# EAGLE board Daughter Card Schematic (EAGLE 6.5.1)
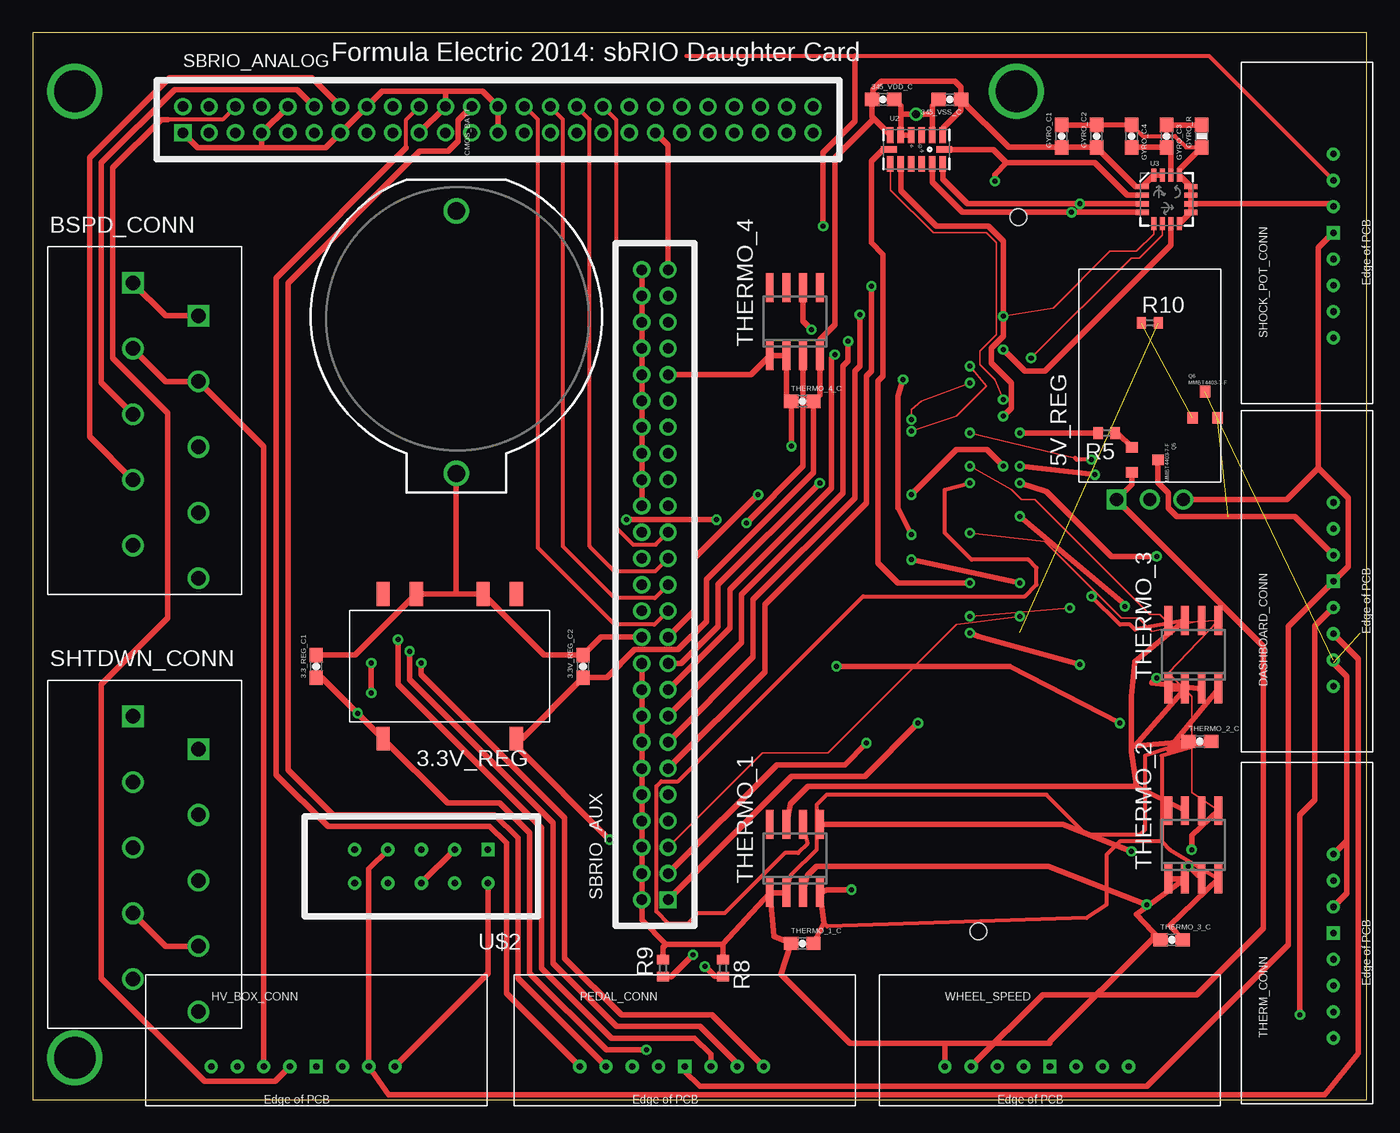
[diagram p0: board, top side]
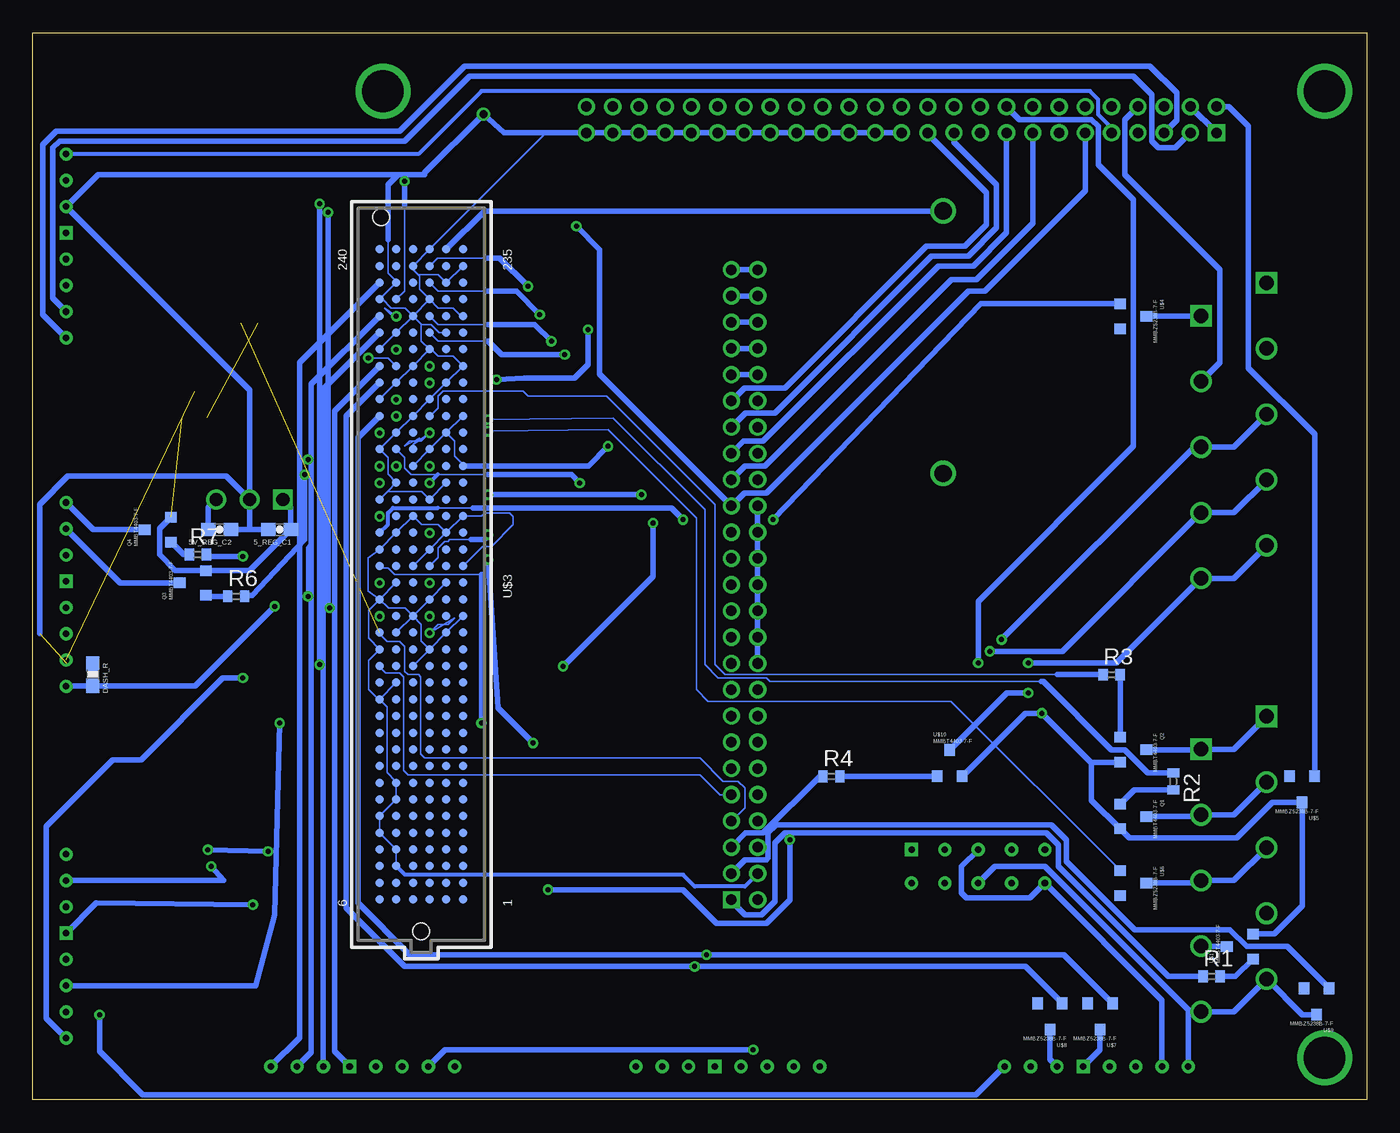
[diagram p1: board, bottom side, seen from below]

Size 101.6 x 81.28 mm. Coordinates in mm from the lower left corner, seen from the top.
Outline: 0,0 101.6,0 101.6,81.28 0,81.28 0,0
Copper layers (1*16): Top 0.035mm / dielectric 1.5mm / Bottom 0.035mm
Design rules "PCBFabExpress DRC *": minimum track width 5mil, minimum drill 15mil, track to track 5mil, track to pad 8mil, pad to pad 8mil, via to via 8mil, smd to smd 8mil, copper to edge 40mil, drill to drill 8mil, minimum pad ring 10mil, minimum via ring 8mil, stop-mask expansion 4mil, vias tented up to drill 15mil, thermal gap 10mil
Net classes: 0 default: clearance 0.205 mm

## Footprints (pad centres in the part's own frame; a part is rotated, then mirrored left to right if it is on the bottom)
0603-CAP = smd 1.1 x 1: 1 -0.85,0; 2 0.85,0
V78XX-1000 = smd 1 x 1.8: 1 -5.08,-5.51; 5 5.08,-5.51; 6 5.08,5.51; 7 2.54,5.51; 9 -2.54,5.51; 10 -5.08,5.51
V78XX-1500R = drill 1 square: P$1 0,2.54 | drill 1: P$2 0,0; P$3 0,-2.54
CONNECTOR_5 = drill 1.1 square: 1 0,0; 2 2.5,5 | drill 1.1: 3 5,0; 4 7.5,5; 5 10,0; 6 12.5,5; 7 15,0; 8 17.5,5; 9 20,0; 10 22.5,5
BATTCOM_20MM_PTH = drill 1.3: 1 11.85,0; 2 -8.15,0
0603-RES = smd 1.1 x 1: 1 -0.85,0; 2 0.85,0
EN3_PCB_8 = drill 0.5 square: P$1 0,0 | drill 0.5: P$2 2,0; P$3 4,0; P$4 6,0; P$5 -8,0; P$6 -6,0; P$7 -4,0; P$8 -2,0
SOT-23-3 = smd 0.8 x 0.9: P$1 0,1; P$2 -0.95,-1; P$3 0.95,-1
R0402 = smd 0.7 x 0.9: 1 -0.65,0; 2 0.65,0
SBRIO_J502_J503 = drill 0.8 square: P$1 0,0 | drill 0.8: P$2 0,2; P$3 2,0; P$4 2,2; P$5 4,0; P$6 4,2; P$7 6,0; P$8 6,2; P$9 8,0; P$10 8,2; P$11 10,0; P$12 10,2; P$13 12,0; P$14 12,2; P$15 14,0; P$16 14,2; P$17 16,0; P$18 16,2; P$19 18,0; P$20 18,2; P$21 20,0; P$22 20,2; P$23 22,0; P$24 22,2; P$25 24,0; P$26 24,2; P$27 26,0; P$28 26,2; P$29 28,0; P$30 28,2; P$31 30,0; P$32 30,2; P$33 32,0; P$34 32,2; P$35 34,0; P$36 34,2; P$37 36,0; P$38 36,2; P$39 38,0; P$40 38,2; P$41 40,0; P$42 40,2; P$43 42,0; P$44 42,2; P$45 44,0; P$46 44,2; P$47 46,0; P$48 46,2; P$49 48,0; P$50 48,2
SO08 = smd 0.6 x 2.2: 1 -1.905,-2.6; 2 -0.635,-2.6; 3 0.635,-2.6; 4 1.905,-2.6; 5 1.905,2.6; 6 0.635,2.6; 7 -0.635,2.6; 8 -1.905,2.6
LGA14 = smd 0.5 x 1.2: 1 2,1.1; 2 1.2,1.1; 3 0.4,1.1; 4 -0.4,1.1; 5 -1.2,1.1; 6 -2,1.1; 8 -2,-1.1; 9 -1.2,-1.1; 10 -0.4,-1.1; 11 0.4,-1.1; 12 1.2,-1.1; 13 2,-1.1 | smd 1.2 x 0.5: 7 -2.1,0; 14 2.1,0
LGA16-4X4 = smd 1 x 0.4: 1 -1.85,0.975; 2 -1.85,0.325; 3 -1.85,-0.325; 4 -1.85,-0.975; 9 1.85,-0.975; 10 1.85,-0.325; 11 1.85,0.325; 12 1.85,0.975 | smd 0.4 x 1: 5 -0.975,-1.85; 6 -0.325,-1.85; 7 0.325,-1.85; 8 0.975,-1.85; 13 0.975,1.85; 14 0.325,1.85; 15 -0.325,1.85; 16 -0.975,1.85
SBRIO_W = drill 0.5 square: P$1 -5.08,-1.27 | drill 0.5: P$2 -5.08,1.27; P$3 -2.54,-1.27; P$4 -2.54,1.27; P$5 0,-1.27; P$6 0,1.27; P$7 2.54,-1.27; P$8 2.54,1.27; P$9 5.08,-1.27; P$10 5.08,1.27
SEAM-40-XX.X-XX-06-X-A = smd 0.635 x 0.635: 1 24.765,3.175; 2 24.765,1.905; 3 24.765,0.635; 4 24.765,-0.635; 5 24.765,-1.905; 6 24.765,-3.175; 7 23.495,3.175; 8 23.495,1.905; 9 23.495,0.635; 10 23.495,-0.635; 11 23.495,-1.905; 12 23.495,-3.175; 13 22.225,3.175; 14 22.225,1.905; 15 22.225,0.635; 16 22.225,-0.635; 17 22.225,-1.905; 18 22.225,-3.175; 19 20.955,3.175; 20 20.955,1.905; 21 20.955,0.635; 22 20.955,-0.635; 23 20.955,-1.905; 24 20.955,-3.175; 25 19.685,3.175; 26 19.685,1.905; 27 19.685,0.635; 28 19.685,-0.635; 29 19.685,-1.905; 30 19.685,-3.175; 31 18.415,3.175; 32 18.415,1.905; 33 18.415,0.635; 34 18.415,-0.635; 35 18.415,-1.905; 36 18.415,-3.175; 37 17.145,3.175; 38 17.145,1.905; 39 17.145,0.635; 40 17.145,-0.635; 41 17.145,-1.905; 42 17.145,-3.175; 43 15.875,3.175; 44 15.875,1.905; 45 15.875,0.635; 46 15.875,-0.635; 47 15.875,-1.905; 48 15.875,-3.175; 49 14.605,3.175; 50 14.605,1.905; 51 14.605,0.635; 52 14.605,-0.635; 53 14.605,-1.905; 54 14.605,-3.175; 55 13.335,3.175; 56 13.335,1.905; 57 13.335,0.635; 58 13.335,-0.635; 59 13.335,-1.905; 60 13.335,-3.175; 61 12.065,3.175; 62 12.065,1.905; 63 12.065,0.635; 64 12.065,-0.635; 65 12.065,-1.905; 66 12.065,-3.175; 67 10.795,3.175; 68 10.795,1.905; 69 10.795,0.635; 70 10.795,-0.635; 71 10.795,-1.905; 72 10.795,-3.175; 73 9.525,3.175; 74 9.525,1.905; 75 9.525,0.635; 76 9.525,-0.635; 77 9.525,-1.905; 78 9.525,-3.175; 79 8.255,3.175; 80 8.255,1.905; 81 8.255,0.635; 82 8.255,-0.635; 83 8.255,-1.905; 84 8.255,-3.175; 85 6.985,3.175; 86 6.985,1.905; 87 6.985,0.635; 88 6.985,-0.635; 89 6.985,-1.905; 90 6.985,-3.175; 91 5.715,3.175; 92 5.715,1.905; 93 5.715,0.635; 94 5.715,-0.635; 95 5.715,-1.905; 96 5.715,-3.175; 97 4.445,3.175; 98 4.445,1.905; 99 4.445,0.635; 100 4.445,-0.635; 101 4.445,-1.905; 102 4.445,-3.175; 103 3.175,3.175; 104 3.175,1.905; 105 3.175,0.635; 106 3.175,-0.635; 107 3.175,-1.905; 108 3.175,-3.175; 109 1.905,3.175; 110 1.905,1.905; 111 1.905,0.635; 112 1.905,-0.635; 113 1.905,-1.905; 114 1.905,-3.175; 115 0.635,3.175; 116 0.635,1.905; 117 0.635,0.635; 118 0.635,-0.635; 119 0.635,-1.905; 120 0.635,-3.175; 121 -0.635,3.175; 122 -0.635,1.905; 123 -0.635,0.635; 124 -0.635,-0.635; 125 -0.635,-1.905; 126 -0.635,-3.175; 127 -1.905,3.175; 128 -1.905,1.905; 129 -1.905,0.635; 130 -1.905,-0.635; 131 -1.905,-1.905; 132 -1.905,-3.175; 133 -3.175,3.175; 134 -3.175,1.905; 135 -3.175,0.635; 136 -3.175,-0.635; 137 -3.175,-1.905; 138 -3.175,-3.175; 139 -4.445,3.175; 140 -4.445,1.905; 141 -4.445,0.635; 142 -4.445,-0.635; 143 -4.445,-1.905; 144 -4.445,-3.175; 145 -5.715,3.175; 146 -5.715,1.905; 147 -5.715,0.635; 148 -5.715,-0.635; 149 -5.715,-1.905; 150 -5.715,-3.175; 151 -6.985,3.175; 152 -6.985,1.905; 153 -6.985,0.635; 154 -6.985,-0.635; 155 -6.985,-1.905; 156 -6.985,-3.175; 157 -8.255,3.175; 158 -8.255,1.905; 159 -8.255,0.635; 160 -8.255,-0.635; 161 -8.255,-1.905; 162 -8.255,-3.175; 163 -9.525,3.175; 164 -9.525,1.905; 165 -9.525,0.635; 166 -9.525,-0.635; 167 -9.525,-1.905; 168 -9.525,-3.175; 169 -10.795,3.175; 170 -10.795,1.905; 171 -10.795,0.635; 172 -10.795,-0.635; 173 -10.795,-1.905; 174 -10.795,-3.175; 175 -12.065,3.175; 176 -12.065,1.905; 177 -12.065,0.635; 178 -12.065,-0.635; 179 -12.065,-1.905; 180 -12.065,-3.175; 181 -13.335,3.175; 182 -13.335,1.905; 183 -13.335,0.635; 184 -13.335,-0.635; 185 -13.335,-1.905; 186 -13.335,-3.175; 187 -14.605,3.175; 188 -14.605,1.905; 189 -14.605,0.635; 190 -14.605,-0.635; 191 -14.605,-1.905; 192 -14.605,-3.175; 193 -15.875,3.175; 194 -15.875,1.905; 195 -15.875,0.635; 196 -15.875,-0.635; 197 -15.875,-1.905; 198 -15.875,-3.175; 199 -17.145,3.175; 200 -17.145,1.905; 201 -17.145,0.635; 202 -17.145,-0.635; 203 -17.145,-1.905; 204 -17.145,-3.175; 205 -18.415,3.175; 206 -18.415,1.905; 207 -18.415,0.635; 208 -18.415,-0.635; 209 -18.415,-1.905; 210 -18.415,-3.175; 211 -19.685,3.175; 212 -19.685,1.905; 213 -19.685,0.635; 214 -19.685,-0.635; 215 -19.685,-1.905; 216 -19.685,-3.175; 217 -20.955,3.175; 218 -20.955,1.905; 219 -20.955,0.635; 220 -20.955,-0.635; 221 -20.955,-1.905; 222 -20.955,-3.175; 223 -22.225,3.175; 224 -22.225,1.905; 225 -22.225,0.635; 226 -22.225,-0.635; 227 -22.225,-1.905; 228 -22.225,-3.175; 229 -23.495,3.175; 230 -23.495,1.905; 231 -23.495,0.635; 232 -23.495,-0.635; 233 -23.495,-1.905; 234 -23.495,-3.175; 235 -24.765,3.175; 236 -24.765,1.905; 237 -24.765,0.635; 238 -24.765,-0.635; 239 -24.765,-1.905; 240 -24.765,-3.175 | hole 1.27: 27.191,0; -27.191,-3.048

## Placement (x,y rotation side)
3.3_REG_C1  10uF  [0603-CAP]  21.59,33.02 90 top
3.3V_REG  V7803-1000  [V78XX-1000]  31.75,33.02 0 top
3.3V_REG_C2  22uF  [0603-CAP]  41.91,33.02 90 top
5_REG_C1  10uF  [0603-CAP]  82.8,43.43 180 bottom
5V_REG  V78XX-1500  [V78XX-1500R]  85.09,45.72 90 top
5V_REG_C2  22uF  [0603-CAP]  87.38,43.43 180 bottom
345_VDD_C  .1uF  [0603-CAP]  64.77,76.2 0 top
345_VSS_C  1uF  [0603-CAP]  69.85,76.2 180 top
BSPD_CONN  CONN_5  [CONNECTOR_5]  7.62,62.23 270 top
CMOS_BATT  [BATTCOM_20MM_PTH]  32.26,59.56 270 top
DASH_R  10k  [0603-RES]  97.03,32.38 270 bottom
DASHBOARD_CONN  EN3_PCB_8  [EN3_PCB_8]  99.06,39.5 90 top
GYRO_C1  .1uF  [0603-CAP]  78.36,73.41 90 top
GYRO_C2  10uF  [0603-CAP]  81.03,73.41 90 top
GYRO_C3  470nF  [0603-CAP]  86.36,73.41 270 top
GYRO_C4  10nF  [0603-CAP]  83.69,73.41 270 top
GYRO_R  10K  [0603-RES]  89.03,73.41 90 top
HV_BOX_CONN  EN3_PCB_8  [EN3_PCB_8]  21.59,2.54 0 top
PEDAL_CONN  EN3_PCB_8  [EN3_PCB_8]  49.66,2.54 0 top
Q1  MMBT4403-7-F  [SOT-23-3]  17.78,21.59 270 bottom
Q2  MMBT4403-7-F  [SOT-23-3]  17.78,26.67 270 bottom
Q3  MMBT4403-7-F  [SOT-23-3]  89.41,39.37 90 bottom
Q4  MMBT4403-7-F  [SOT-23-3]  92.08,43.43 90 bottom
Q5  MMBT4403-7-F  [SOT-23-3]  84.71,48.77 270 top
Q6  MMBT4403-7-F  [SOT-23-3]  89.28,52.96 0 top
R1  1.3K  [R0402]  11.81,9.4 0 bottom
R2  1.3K  [R0402]  14.73,24.26 270 bottom
R3  1.3K  [R0402]  19.43,32.38 0 bottom
R4  1.3K  [R0402]  40.77,24.64 0 bottom
R5  1.3K  [R0402]  81.79,50.8 180 top
R6  1.3K  [R0402]  86.11,38.35 0 bottom
R7  1.3K  [R0402]  89.03,41.53 0 bottom
R8  1K  [R0402]  52.58,10.03 270 top
R9  1K  [R0402]  48.01,10.03 90 top
R10  1.3K  [R0402]  85.09,59.18 0 top
SBRIO_ANALOG  SBRIO_MIO  [SBRIO_J502_J503]  11.43,73.66 0 top
SBRIO_AUX  SBRIO_AUX  [SBRIO_J502_J503]  48.39,15.24 90 top
SHOCK_POT_CONN  EN3_PCB_8  [EN3_PCB_8]  99.06,66.04 90 top
SHTDWN_CONN  CONN_5  [CONNECTOR_5]  7.62,29.21 270 top
THERM_CONN  EN3_PCB_8  [EN3_PCB_8]  99.06,12.7 90 top
THERMO_1  MAX6675  [SO08]  58.04,18.38 0 top
THERMO_1_C  .1uF  [0603-CAP]  58.61,11.91 0 top
THERMO_2  MAX6675  [SO08]  88.39,19.43 0 top
THERMO_2_C  .1uF  [0603-CAP]  88.9,27.3 0 top
THERMO_3  MAX6675  [SO08]  88.39,33.91 0 top
THERMO_3_C  .1uF  [0603-CAP]  86.74,12.19 0 top
THERMO_4  MAX6675  [SO08]  58.04,59.28 0 top
THERMO_4_C  .1uF  [0603-CAP]  58.61,53.21 0 top
U2  ADXL345  [LGA14]  67.31,72.39 0 top
U3  L3G4200D  [LGA16-4X4]  86.36,68.58 0 top
U$1  MMBT4403-7-F  [SOT-23-3]  9.65,11.68 90 bottom
U$2  SBRIO_W500  [SBRIO_W]  29.59,17.78 180 top
U$3  SBRIO_RMC  [SEAM-40-XX.X-XX-06-X-A]  72.01,40.03 270 bottom
U$4  MMBZ5238B-7-F  [SOT-23-3]  17.78,59.69 270 bottom
U$5  MMBZ5238B-7-F  [SOT-23-3]  4.92,23.65 180 bottom
U$6  MMBZ5238B-7-F  [SOT-23-3]  17.78,16.51 270 bottom
U$7  MMBZ5238B-7-F  [SOT-23-3]  20.32,6.35 180 bottom
U$8  MMBZ5238B-7-F  [SOT-23-3]  24.13,6.35 180 bottom
U$9  MMBZ5238B-7-F  [SOT-23-3]  3.81,7.49 180 bottom
U$10  MMBT4403-7-F  [SOT-23-3]  31.75,25.65 0 bottom
WHEEL_SPEED  EN3_PCB_8  [EN3_PCB_8]  77.47,2.54 0 top

## Library data of the parts
3.3_REG_C1 3.3V_REG_C2 5_REG_C1 5V_REG_C2 345_VDD_C 345_VSS_C GYRO_C1-GYRO_C4 GYRO_R THERMO_1_C THERMO_2_C THERMO_3_C THERMO_4_C = SparkFun-Passives
3.3V_REG 5V_REG BSPD_CONN DASHBOARD_CONN HV_BOX_CONN PEDAL_CONN Q1-Q6 SBRIO_ANALOG SBRIO_AUX SHOCK_POT_CONN SHTDWN_CONN THERM_CONN U$1 U$2 U$4-U$10 WHEEL_SPEED = formula electric
CMOS_BATT = SparkFun-Electromechanical
DASH_R = SparkFun-Resistors; PROD_ID: RES-00824
R1-R10 = resistor
THERMO_1-THERMO_4 = max6675
U2 U3 = SparkFun-Sensors
U$3 = SEAM-40-XX.X-XX-06-X-A

## Nets
3.3V: 3.3V_REG.5 3.3V_REG_C2.1 345_VDD_C.1 345_VSS_C.1 GYRO_C1.1 GYRO_C2.1 THERMO_1.4 THERMO_1_C.2 THERMO_2.4 THERMO_2_C.2 THERMO_3.4 THERMO_3_C.2 THERMO_4.4 THERMO_4_C.2 U2.1 U2.6 U3.1 U3.15 U3.16
5V: 5V_REG.P$3 5V_REG_C2.2 DASHBOARD_CONN.P$1 PEDAL_CONN.P$1 SHOCK_POT_CONN.P$1
12V: 3.3_REG_C1.1 3.3V_REG.1 5_REG_C1.1 5V_REG.P$1 Q1.P$3 Q2.P$3 Q3.P$3 Q4.P$3 Q5.P$3 Q6.P$3 U$1.P$3 U$5.P$1 U$10.P$3 WHEEL_SPEED.P$6
AI3: BSPD_CONN.5 BSPD_CONN.6 PEDAL_CONN.P$2 SBRIO_ANALOG.P$12
AI4: BSPD_CONN.7 BSPD_CONN.8 PEDAL_CONN.P$3 SBRIO_ANALOG.P$14
AI5: PEDAL_CONN.P$4 SBRIO_ANALOG.P$18
AI6: PEDAL_CONN.P$5 SBRIO_ANALOG.P$20
AI7: PEDAL_CONN.P$6 SBRIO_ANALOG.P$24
AI11: SBRIO_ANALOG.P$11 SBRIO_AUX.P$31 SHOCK_POT_CONN.P$3
AI12: SBRIO_ANALOG.P$15 SBRIO_AUX.P$33
AI13: SBRIO_ANALOG.P$17 SBRIO_AUX.P$35
AI14: SBRIO_ANALOG.P$21 SBRIO_AUX.P$37
AI15: SBRIO_ANALOG.P$23 SBRIO_AUX.P$39
AO0: SBRIO_ANALOG.P$28 SBRIO_AUX.P$23
AO1: SBRIO_ANALOG.P$30 SBRIO_AUX.P$25
AO2: SBRIO_ANALOG.P$32 SBRIO_AUX.P$27
AO3: SBRIO_ANALOG.P$34 SBRIO_AUX.P$29
CAN_H: DASHBOARD_CONN.P$7 HV_BOX_CONN.P$3 U$2.P$7
CAN_L: DASHBOARD_CONN.P$8 HV_BOX_CONN.P$4 U$2.P$2
DIO0: U$3.228 WHEEL_SPEED.P$4
DIO1: U$3.216 WHEEL_SPEED.P$3
DIO2: U$3.210 WHEEL_SPEED.P$2
DIO3: U$3.198 WHEEL_SPEED.P$1
DIO6: R5.2 U$3.174
DIO7: R6.2 U$3.162
DIO8: R7.2 U$3.156
DIO9: DASH_R.2 DASHBOARD_CONN.P$5 U$3.144
DIO11: R1.1 SBRIO_AUX.P$1 U$3.126
DIO12: SBRIO_AUX.P$3 U$3.120 U$9.P$2
DIO13: R4.1 SBRIO_AUX.P$5 U$3.108
DIO14: R10.2 SBRIO_AUX.P$7 U$3.102
DIO15: SBRIO_AUX.P$9 U$3.90
DIO16: SBRIO_AUX.P$11 U$3.231
DIO17: SBRIO_AUX.P$13 U$3.225
DIO18: SBRIO_AUX.P$15 U$3.213
DIO19: SBRIO_AUX.P$17 U$3.207
DIO29: U2.7 U$3.117
DIO30: U2.12 U3.4 U$3.105
DIO31: U2.13 U3.3 U$3.99
DIO32: U2.14 U3.2 U$3.221
DIO33: U3.5 U$3.215
DIO34: U3.7 U$3.203
DIO35: U3.6 U$3.197
DIO36: U2.8 U$3.185
DIO37: U2.9 U$3.179
DIO38: SBRIO_AUX.P$19 U$3.167
DIO39: SBRIO_AUX.P$21 U$3.161
GND: 3.3_REG_C1.2 3.3V_REG.7 3.3V_REG.9 3.3V_REG_C2.2 5_REG_C1.2 5V_REG.P$2 5V_REG_C2.1 345_VDD_C.2 345_VSS_C.2 CMOS_BATT.1 GYRO_C1.2 GYRO_C2.2 GYRO_C4.1 GYRO_R.1 R8.1 R9.2 SBRIO_ANALOG.P$1 SBRIO_ANALOG.P$4 SBRIO_ANALOG.P$7 SBRIO_ANALOG.P$10 SBRIO_ANALOG.P$13 SBRIO_ANALOG.P$16 SBRIO_ANALOG.P$19 SBRIO_ANALOG.P$22 SBRIO_ANALOG.P$25 SBRIO_ANALOG.P$26 SBRIO_ANALOG.P$27 SBRIO_ANALOG.P$29 SBRIO_ANALOG.P$31 SBRIO_ANALOG.P$33 SBRIO_ANALOG.P$35 SBRIO_ANALOG.P$37 SBRIO_ANALOG.P$39 SBRIO_ANALOG.P$41 SBRIO_ANALOG.P$43 SBRIO_ANALOG.P$45 SBRIO_ANALOG.P$47 SBRIO_ANALOG.P$49 SBRIO_AUX.P$2 SBRIO_AUX.P$4 SBRIO_AUX.P$6 SBRIO_AUX.P$8 SBRIO_AUX.P$10 SBRIO_AUX.P$12 SBRIO_AUX.P$14 SBRIO_AUX.P$16 SBRIO_AUX.P$18 SBRIO_AUX.P$20 SBRIO_AUX.P$22 SBRIO_AUX.P$24 SBRIO_AUX.P$26 SBRIO_AUX.P$28 SBRIO_AUX.P$30 SBRIO_AUX.P$32 SBRIO_AUX.P$34 SBRIO_AUX.P$36 SBRIO_AUX.P$38 SBRIO_AUX.P$40 SBRIO_AUX.P$41 SBRIO_AUX.P$42 SBRIO_AUX.P$43 SBRIO_AUX.P$44 SBRIO_AUX.P$45 SBRIO_AUX.P$46 SBRIO_AUX.P$47 SBRIO_AUX.P$48 SBRIO_AUX.P$49 SBRIO_AUX.P$50 SHOCK_POT_CONN.P$2 THERM_CONN.P$2 THERM_CONN.P$4 THERMO_1.1 THERMO_1.2 THERMO_1_C.1 THERMO_2.1 THERMO_2.2 THERMO_2_C.1 THERMO_3.1 THERMO_3.2 THERMO_3_C.1 THERMO_4.1 THERMO_4.2 THERMO_4_C.1 U2.2 U2.4 U2.5 U3.8 U3.9 U3.10 U3.11 U3.12 U3.13 U$3.17 U$3.23 U$3.30 U$3.36 U$3.41 U$3.47 U$3.78 U$3.83 U$3.88 U$3.93 U$3.96 U$3.98 U$3.101 U$3.103 U$3.106 U$3.111 U$3.114 U$3.116 U$3.119 U$3.121 U$3.124 U$3.129 U$3.132 U$3.134 U$3.137 U$3.139 U$3.142 U$3.147 U$3.150 U$3.152 U$3.155 U$3.157 U$3.160 U$3.165 U$3.168 U$3.170 U$3.173 U$3.175 U$3.178 U$3.183 U$3.186 U$3.188 U$3.191 U$3.193 U$3.196 U$3.201 U$3.204 U$3.206 U$3.209 U$3.211 U$3.214 U$3.219 U$3.222 U$3.224 U$3.227 U$3.229 U$3.232 U$3.237 WHEEL_SPEED.P$5
N$: Q4.P$2 R7.1
N$1: DASH_R.1
N$2: CMOS_BATT.2 U$3.236
N$3: DASHBOARD_CONN.P$6 Q6.P$1
N$4: SBRIO_ANALOG.P$2 U$5.P$2
N$5: Q6.P$2 R10.1
N$7: Q1.P$1 SHTDWN_CONN.3 SHTDWN_CONN.4
N$8: Q2.P$1 SHTDWN_CONN.1 SHTDWN_CONN.2
N$9: SHTDWN_CONN.5 SHTDWN_CONN.6 U$6.P$1
N$10: U$3.195 U$6.P$2
N$11: R2.1 U$3.189
N$12: R3.1 U$3.177
N$13: HV_BOX_CONN.P$1 U$7.P$1
N$14: HV_BOX_CONN.P$2 U$8.P$1
N$15: R8.2 U$3.192 U$8.P$2
N$16: R9.1 U$3.180 U$7.P$2
N$17: THERMO_1.7 THERMO_2.7 THERMO_3.7 U$3.171
N$18: THERMO_1.5 THERMO_2.5 THERMO_3.5 U$3.159
N$19: HV_BOX_CONN.P$5 U$2.P$3 U$2.P$6
N$20: HV_BOX_CONN.P$8 SBRIO_ANALOG.P$6
N$21: BSPD_CONN.3 BSPD_CONN.4 HV_BOX_CONN.P$7 SBRIO_ANALOG.P$8
N$22: DASHBOARD_CONN.P$2 Q5.P$1
N$23: DASHBOARD_CONN.P$3 Q3.P$1
N$24: DASHBOARD_CONN.P$4 Q4.P$1
N$25: THERMO_1.6 U$3.153
N$26: U$3.141
N$27: THERMO_3.6 U$3.135
N$28: THERMO_4.6 U$3.123
N$29: THERM_CONN.P$1 THERMO_1.3
N$30: THERM_CONN.P$3 THERMO_2.3
N$31: THERM_CONN.P$5 THERMO_3.3
N$32: THERM_CONN.P$7 THERMO_4.3
N$33: SHTDWN_CONN.9 SHTDWN_CONN.10 U$9.P$1
N$34: SBRIO_ANALOG.P$9 SHOCK_POT_CONN.P$4
N$35: SBRIO_ANALOG.P$5 SHOCK_POT_CONN.P$5
N$36: SBRIO_ANALOG.P$3 SHOCK_POT_CONN.P$6
N$37: GYRO_C3.2 GYRO_C4.2 U3.14
N$38: GYRO_C3.1 GYRO_R.2
N$42: BSPD_CONN.1 BSPD_CONN.2 U$4.P$1
N$43: U$3.138 U$4.P$2
N$44: SHTDWN_CONN.7 SHTDWN_CONN.8 U$1.P$1
N$45: BSPD_CONN.9 BSPD_CONN.10 U$10.P$1
N$46: R1.2 U$1.P$2
N$47: Q1.P$2 R2.2
N$48: Q2.P$2 R3.2
N$49: R4.2 U$10.P$2
N$50: Q5.P$2 R5.1
N$51: Q3.P$2 R6.1
SHIELD: HV_BOX_CONN.P$6 U$2.P$5 U$2.P$10

## Tracks (layer width: path | path; a pad name or v marks a point on that pad's centre or on a via)
3.3V  (via drill 0.38)
  Top 0.305: THERMO_2_C.2 85.98,26.2 85.98,19.68 | 85.98,19.68 86.61,19.05 THERMO_2.4 | 85.98,19.68 82.8,19.68 81.79,18.67 81.79,14.86 80.26,13.84 60.52,13.21 60.26,13.47
  Top 0.406: U3.15 U3.16 U3.1 84.03,69.56 GYRO_C2.1 GYRO_C1.1 74.34,72.56 345_VSS_C.1 | THERMO_3.4 86.49,26.71 THERMO_2_C.2 | THERMO_1_C.2 60.26,13.47 THERMO_1.4 60.48,16 v62.36,16 | THERMO_2.4 86.61,13.3 THERMO_3_C.2 | v43.94,19.81 36.83,26.92 3.3V_REG.5 37.25,27.51 3.3V_REG_C2.1 43.73,32.17 45.85,34.29 49.15,34.29 51.31,36.45 51.31,39.62 59.46,47.78 THERMO_4_C.2 59.94,53.7 THERMO_4.4 59.94,57.91 61.09,59.05 61.09,71.75 64.07,74.73 | 345_VSS_C.1 70.7,77.13 70.23,77.6 64.64,77.6 64.01,76.96 64.01,76.29 345_VDD_C.1 63.92,74.88 64.07,74.73 | U2.6 64.07,74.73 | U2.1 69.34,73.52 69.34,74.04 70.7,75.4 345_VSS_C.1
  Bottom 0.406: v62.36,16 52.07,16 49.53,13.46 45.72,13.46 43.94,15.24 v43.94,19.81
5V
  Top 0.406: 97.92,48.13 100.2,45.85 100.2,40.64 DASHBOARD_CONN.P$1 95.63,36.07 95.63,11.81 84.84,1.02 50.8,1.02 49.66,2.16 PEDAL_CONN.P$1 | 97.92,48.13 97.92,64.9 SHOCK_POT_CONN.P$1 | 5V_REG.P$3 95.5,45.72 97.92,48.13
  Bottom 0.406: 5V_REG.P$3 88.23,45.12 5V_REG_C2.2
12V  (via drill 0.38)  (1 unrouted)
  Top 0.406: Q5.P$3 83.71,46.88 5V_REG.P$1 93.73,34.54 93.73,13.08 88.65,8 76.93,8 WHEEL_SPEED.P$6 | 3.3_REG_C1.1 22.01,32.17 v24.74,29.44 3.3V_REG.1 31.57,22.61 35.56,22.61 37.85,20.32 37.85,9.65 43.69,3.81 v46.74,3.81
  Bottom 0.406: 5V_REG.P$1 81.95,45.12 5_REG_C1.1 85.07,40.32 Q3.P$3 90.74,40.32 91.95,41.53 91.95,43.51 Q4.P$3 | U$1.P$3 7.05,12.63 4.92,14.76 U$5.P$1 7.19,22.65 9.91,19.94 18.08,19.94 Q1.P$3 20.95,22.82 20.95,25.72 | Q2.P$3 20.95,25.72 | 20.95,25.72 21.02,25.72 v24.74,29.44 26.02,29.44 U$10.P$3 | WHEEL_SPEED.P$6 70.2,3.81 v46.74,3.81
AI3  (via drill 0.38)
  Top 0.406: SBRIO_ANALOG.P$12 20.13,76.96 10.79,76.96 5.21,71.37 5.21,54.64 BSPD_CONN.5 | PEDAL_CONN.P$2 51.66,3.46 50.42,4.7 44.07,4.7 38.73,10.03 38.73,20.7 27.81,31.62 v27.81,35.05
  Bottom 0.406: BSPD_CONN.5 10.12,49.73 BSPD_CONN.6 13.13,49.73 v27.81,35.05
AI4  (via drill 0.38)
  Top 0.406: SBRIO_ANALOG.P$14 21.24,77.85 10.41,77.85 4.32,71.75 4.32,50.53 BSPD_CONN.7 | PEDAL_CONN.P$3 53.66,2.73 50.8,5.59 44.45,5.59 39.62,10.41 39.62,21.08 28.7,32 v28.7,34.16
  Bottom 0.406: BSPD_CONN.7 10.12,44.73 BSPD_CONN.8 23.19,34.16 v28.7,34.16
AI5  (via drill 0.38)
  Top 0.406: PEDAL_CONN.P$4 51.72,6.48 44.83,6.48 40.51,10.79 40.51,21.46 29.59,32.38 v29.59,33.27
  Bottom 0.406: v29.59,33.27 29.59,37.97 17.78,49.78 17.78,68.58 20.45,71.25 20.45,74.17 20.95,74.68 26.45,74.68 SBRIO_ANALOG.P$18
AI6
  Top 0.305: 28.45,72.52 28.45,74.68 SBRIO_ANALOG.P$20
  Top 0.406: PEDAL_CONN.P$5 36.07,8.13 36.07,19.56 34.8,20.83 22.48,20.83 18.54,24.77 18.54,62.61 28.45,72.52
AI7
  Top 0.406: PEDAL_CONN.P$6 36.96,9.24 36.96,19.94 35.18,21.72 22.86,21.72 19.43,25.15 19.43,62.23 29.46,72.26 31.62,72.26 32.38,73.03 32.38,74.61 SBRIO_ANALOG.P$24
AI11  (via drill 0.38)
  Top 0.305: SHOCK_POT_CONN.P$3 89.6,79.5 62.61,79.5 49.78,79.5
  Top 0.406: v60.2,66.55 60.2,72.14 62.61,74.55 62.61,79.5
  Bottom 0.406: SBRIO_ANALOG.P$11 21.43,69.25 29.08,61.59 30.35,61.59 45.72,46.23 47.4,46.23 SBRIO_AUX.P$31 58.42,55.27 58.42,64.77 v60.2,66.55
AI12
  Bottom 0.406: SBRIO_AUX.P$33 47.37,48.26 45.85,48.26 31.62,62.48 29.72,62.48 25.43,66.77 SBRIO_ANALOG.P$15
AI13
  Bottom 0.406: SBRIO_AUX.P$35 47.46,50.16 45.97,50.16 32.64,63.5 29.97,63.5 27.43,66.04 SBRIO_ANALOG.P$17
AI14
  Bottom 0.406: SBRIO_AUX.P$37 47.3,52.32 45.09,52.32 33.15,64.26 30.35,64.26 28.19,66.42 28.19,69.72 31.43,72.96 SBRIO_ANALOG.P$21
AI15
  Bottom 0.406: SBRIO_AUX.P$39 47.4,54.23 44.32,54.23 33.53,65.02 30.61,65.02 28.96,66.67 28.96,69.09 33.43,73.56 SBRIO_ANALOG.P$23
AO0
  Top 0.305: SBRIO_ANALOG.P$28 37.5,75.66 38.48,74.68 38.48,42.04 44.32,36.2 47.34,36.2 SBRIO_AUX.P$23
AO1
  Top 0.305: SBRIO_ANALOG.P$30 39.43,75.63 40.39,74.68 40.39,42.16 44.32,38.23 47.37,38.23 SBRIO_AUX.P$25
AO2
  Top 0.305: SBRIO_ANALOG.P$32 42.42,74.68 42.42,42.16 44.32,40.26 47.41,40.26 SBRIO_AUX.P$27
AO3
  Top 0.305: SBRIO_ANALOG.P$34 44.45,74.64 44.45,43.56 45.72,42.29 47.44,42.29 SBRIO_AUX.P$29
CAN_H
  Top 0.406: DASHBOARD_CONN.P$7 100.97,33.59 100.97,3.56 98.42,0.38 27.11,0.38 HV_BOX_CONN.P$3 25.59,17.59 U$2.P$7
CAN_L  (via drill 0.38)
  Top 0.406: DASHBOARD_CONN.P$8 97.66,36.1 97.66,22.86 96.52,21.72 v96.52,6.48 | U$2.P$2 34.67,9.62 HV_BOX_CONN.P$4
  Bottom 0.406: v96.52,6.48 96.52,3.68 93.22,0.38 29.75,0.38 HV_BOX_CONN.P$4
DIO0
  Bottom 0.406: U$3.228 81.28,56.16 81.28,4.73 WHEEL_SPEED.P$4
DIO1
  Bottom 0.406: U$3.216 80.39,54.51 80.39,3.62 WHEEL_SPEED.P$3
DIO2
  Bottom 0.406: U$3.210 79.5,54.13 79.5,2.57 WHEEL_SPEED.P$2
DIO3
  Bottom 0.406: U$3.198 78.61,52.48 78.61,3.68 WHEEL_SPEED.P$1
DIO6  (via drill 0.38)
  Top 0.406: v75.18,50.8 R5.2
  Bottom 0.406: U$3.174 v75.18,50.8
DIO7  (via drill 0.38)
  Top 0.406: v80.9,47.62 v75.18,48.26
  Bottom 0.127: U$3.162 v75.18,48.26
  Bottom 0.406: v80.9,47.62 80.9,42.67 84.9,38.42 85.39,38.42 R6.2
DIO8  (via drill 0.38)
  Top 0.406: v75.18,46.99 77.22,46.35 82.17,41.4 v85.6,41.4
  Bottom 0.127: U$3.156 v75.18,46.99
  Bottom 0.406: v85.6,41.4 88.25,41.4 R7.2
DIO9  (via drill 0.38)
  Top 0.406: v83.19,37.59 83.19,37.72 v75.18,44.45
  Bottom 0.127: U$3.144 v75.18,44.45
  Bottom 0.406: DASHBOARD_CONN.P$5 99.02,31.54 DASH_R.2 89.24,31.54 v83.19,37.59 | v75.18,44.45 75.21,44.48 U$3.144
DIO11  (via drill 0.38)
  Top 0.406: v67.44,28.7 63.37,24.64 57.78,24.64 SBRIO_AUX.P$1
  Bottom 0.127: U$3.126 75.03,40.51 74.55,40.51 74.04,40.01 67.44,40.01
  Bottom 0.406: 67.44,40.01 v67.44,28.7 | SBRIO_AUX.P$1 48.39,15.11 47.37,14.1 46.1,14.1 45.09,15.11 45.09,19.56 44.32,20.32 24.38,20.32 23.5,19.43 23.5,17.78 15.11,9.4 R1.1
DIO12  (via drill 0.38)
  Top 0.406: v75.18,39.37 v66.93,41.15 | v63.5,27.18 61.85,25.53 56.67,25.53 SBRIO_AUX.P$3
  Bottom 0.406: U$3.120 75.16,39.4 v75.18,39.37 | v66.93,41.15 66.17,29.84 v63.5,27.18 | U$9.P$2 6.05,11.68 9.14,11.68 10.41,12.95 17.65,12.95 22.86,18.16 22.86,19.81 24,20.95 44.96,20.95 45.59,20.32 45.59,18.41 45.72,18.29 47.34,18.29 SBRIO_AUX.P$3
DIO13  (via drill 0.38)
  Top 0.127: v75.18,36.83 70.36,36.2 60.58,26.42 55.56,26.42 SBRIO_AUX.P$5
  Bottom 0.127: U$3.108 v75.18,36.83
  Bottom 0.406: SBRIO_AUX.P$5 47.31,20.32 45.97,20.32 41.66,24.64 R4.1
DIO14  (1 unrouted)
  Bottom 0.127: U$3.102 75.18,35.5 74.61,34.92 73.66,34.92 73.28,34.54 73.28,32.64 73.03,32.38 72.23,32.38 72.07,32.23 72.07,26.35 71.75,26.04 50.8,26.04 49.02,24.26 47.88,24.26 47.37,23.75 47.37,22.26 SBRIO_AUX.P$7
DIO15
  Bottom 0.127: U$3.90 75.18,32.96 74.74,32.51 73.66,32.51 73.34,32.19 73.34,25.08 73.03,24.77 50.8,24.77 49.27,23.24 SBRIO_AUX.P$9
DIO16  (via drill 0.38)
  Top 0.406: v63.88,61.98 63.88,55.5 63.5,55.12 63.5,45.47 55.75,37.72 55.75,32.61 SBRIO_AUX.P$11
  Bottom 0.127: U$3.231 70.76,64.14 66.93,64.14
  Bottom 0.406: 66.93,64.14 66.04,64.14 v63.88,61.98
DIO17  (via drill 0.38)
  Top 0.406: v62.99,59.82 62.99,55.88 62.61,55.5 62.61,45.85 54.86,38.1 54.86,33.72 SBRIO_AUX.P$13
  Bottom 0.127: U$3.225 70.71,61.59 66.93,61.59
  Bottom 0.406: 66.93,61.59 64.77,61.59 v62.99,59.82
DIO18  (via drill 0.38)
  Top 0.406: SBRIO_AUX.P$15 53.98,34.83 53.98,38.48 61.72,46.23 61.72,55.88 62.1,56.26 v62.1,57.78
  Bottom 0.127: 66.93,59.05 70.71,59.05 U$3.213
  Bottom 0.406: v62.1,57.78 63.37,59.05 66.93,59.05
DIO19  (via drill 0.38)
  Top 0.406: SBRIO_AUX.P$17 53.09,35.94 53.09,38.86 60.83,46.61 60.83,56.52 v61.09,56.77
  Bottom 0.127: 66.93,57.78 70.71,57.78 U$3.207
  Bottom 0.406: v61.09,56.77 65.91,56.77 66.93,57.78
DIO29  (via drill 0.38)
  Top 0.406: U2.7 64.77,72.39 63.88,71.5 63.88,65.28 64.77,64.39 64.77,55.12 64.39,54.74 64.39,40.89 65.91,39.37 v71.37,39.37
  Bottom 0.406: U$3.117 v71.37,39.37
DIO30  (via drill 0.38)
  Top 0.127: v71.37,36.83 v78.99,37.47
  Top 0.406: U3.4 v79.12,67.61 70.83,67.61 68.51,69.92 U2.12
  Bottom 0.127: U$3.105 71.35,36.85 v71.37,36.83
  Bottom 0.406: v78.99,37.47 79.12,37.59 v79.12,67.61
DIO31  (via drill 0.38)
  Top 0.406: U3.3 v79.76,68.25 71.19,68.25 69.31,70.14 U2.13 | v71.37,35.56 72.01,35.31 v79.76,33.15
  Bottom 0.127: U$3.99 71.35,35.59 70.74,36.2 69.98,36.2 69.47,36.7 v71.37,35.56
  Bottom 0.406: v79.76,33.15 v79.76,68.25
DIO32  (via drill 0.38)
  Top 0.406: U3.2 83.37,68.91 80.9,71.37 74.17,71.37 | 74.17,71.37 73.15,72.39 U2.14 | v73.28,69.98 73.28,70.48 74.17,71.37
  Bottom 0.127: U$3.221 73.28,61.62 73.28,68.2
  Bottom 0.406: 73.28,68.2 v73.28,69.98
DIO33  (via drill 0.38)
  Top 0.127: v73.91,59.69 77.72,60.33 82.04,64.64 84.07,64.64 85.39,65.95 U3.5
  Bottom 0.127: U$3.215 74.19,59.72 74.8,60.33 v73.91,59.69
DIO34  (via drill 0.38)
  Top 0.406: U3.7 86.69,65.09 77.09,55.5 75.95,55.5 75.56,55.5 v73.91,57.15
  Bottom 0.127: U$3.203 v73.91,57.15
DIO35  (via drill 0.38)
  Top 0.127: v76.04,56.52 83.66,64.14 84.3,64.14 86.03,65.87 U3.6
  Bottom 0.127: U$3.197 74.52,56.52 v76.04,56.52
DIO36  (via drill 0.38)
  Top 0.127: v73.91,53.34 73.28,54.86 72.14,56.01 72.14,57.02 73.41,58.29 73.41,65.28 72.64,66.04 68.58,66.04 65.31,69.31 U2.8
  Bottom 0.127: U$3.185 73.89,53.37 v73.91,53.34
DIO37  (via drill 0.38)
  Top 0.406: U2.9 66.11,69.27 68.83,66.55 72.77,66.55 73.91,65.41 73.91,58.17 73.03,57.28 73.03,56.13 74.55,54.61 74.55,52.7 v73.91,52.07
  Bottom 0.406: U$3.179 73.94,52.09 v73.91,52.07
DIO38  (via drill 0.38)
  Top 0.406: SBRIO_AUX.P$19 49.37,33.24 52.2,36.07 52.2,39.24 v59.94,46.99
  Bottom 0.127: U$3.167 73.28,48.92 73.28,48.13 72.77,47.62 66.93,47.62
  Bottom 0.406: 66.93,47.62 60.58,47.62 v59.94,46.99
DIO39  (via drill 0.38)
  Top 0.406: SBRIO_AUX.P$21 50.42,37.27 50.42,41.27 v55.24,46.1 | v66.93,46.1 70.36,49.53 72.67,49.53 U$3.161 v73.91,48.26
  Bottom 0.406: v55.24,46.1 v66.93,46.1 | U$3.161 v73.91,48.26
GND  (via drill 0.38, 0.6)  (1 unrouted)
  Top 0.305: THERMO_2_C.1 84.71,26.2 84.71,20.57 84.33,20.19 80.26,20.19 77.22,23.24 60.45,23.24 59.69,22.48 59.69,19.05 57.72,17.08 THERMO_1.2 | GYRO_C4.1 84.54,73.41 87,73.41 87.84,72.56 GYRO_R.1
  Top 0.406: 3.3_REG_C1.2 24.55,33.87 3.3V_REG.9 32.13,38.53 | 32.13,38.53 3.3V_REG.7 38.95,33.87 3.3V_REG_C2.2 43.28,35.24 SBRIO_AUX.P$22 | SBRIO_AUX.P$50 SBRIO_AUX.P$48 SBRIO_AUX.P$46 SBRIO_AUX.P$44 SBRIO_AUX.P$42 SBRIO_AUX.P$40 SBRIO_AUX.P$38 SBRIO_AUX.P$36 SBRIO_AUX.P$34 SBRIO_AUX.P$32 | SBRIO_AUX.P$20 SBRIO_AUX.P$18 SBRIO_AUX.P$16 SBRIO_AUX.P$14 SBRIO_AUX.P$12 SBRIO_AUX.P$10 SBRIO_AUX.P$8 SBRIO_AUX.P$6 SBRIO_AUX.P$4 SBRIO_AUX.P$2 46.39,13.72 48.24,11.86 | U3.10 U3.11 U3.12 U3.13 87.33,70.86 GYRO_R.1 | U3.8 U3.9 U3.10 | GYRO_C1.2 GYRO_C2.2 83.65,74.3 GYRO_C4.1 | 345_VSS_C.2 68.51,75.71 68.51,75.06 | 345_VDD_C.2 66.11,75.71 66.11,75.09 | 66.11,75.09 U2.5 U2.4 | 66.11,75.09 v67.28,75.09 68.48,75.09 68.51,75.06 | U2.2 68.51,75.06 | SBRIO_AUX.P$41 54.7,55.24 THERMO_4.1 THERMO_4.2 57.4,53.57 THERMO_4_C.1 57.78,53.19 v57.78,49.78 | THERMO_3.1 THERMO_3.2 83.95,26.96 THERMO_2_C.1 | THERMO_2.1 THERMO_2.2 84.07,14.14 THERMO_3_C.1 85.34,12.53 85.34,12.32 77.47,4.45 77.47,4.32 69.6,4.32 69.47,4.32 | THERMO_1.1 THERMO_1.2 | THERMO_1.1 52.53,11.86 | 100.08,19.72 100.08,32.26 99.06,33.27 | 100.08,19.72 THERM_CONN.P$4 | U3.10 98.84,68.25 SHOCK_POT_CONN.P$2 | 52.53,11.86 48.24,11.86 | 69.47,4.32 62.23,4.32 57,9.55 THERMO_1_C.1 56.45,12.45 THERMO_1.1 | SBRIO_ANALOG.P$19 SBRIO_ANALOG.P$22 31.43,76.77 31.37,76.83 | SBRIO_ANALOG.P$25 SBRIO_ANALOG.P$26 34.26,76.83 31.37,76.83 | THERM_CONN.P$2 100.08,15.72 100.08,19.72 | 17.4,72.52 22.29,72.52 SBRIO_ANALOG.P$13 SBRIO_ANALOG.P$16 26.61,76.83 31.37,76.83 | 17.4,72.52 12.57,72.52 SBRIO_ANALOG.P$1 | 17.4,72.52 17.43,72.55 SBRIO_ANALOG.P$7 SBRIO_ANALOG.P$10
  Top 0.406: SBRIO_AUX.P$49 48.39,72.7 SBRIO_ANALOG.P$37 | CMOS_BATT.1 32.26,38.66 32.13,38.53 | R9.2 48.01,11.62 48.24,11.86 | R8.1 52.58,11.81 52.53,11.86 | WHEEL_SPEED.P$5 69.47,4.32
  Bottom 0.127: U$3.237 62.51,73.66 | U$3.237 71.3,64.8 | U$3.237 U$3.232 72.64,63.25 72.26,62.87 | U$3.219 U$3.214 | U$3.214 U$3.209 U$3.204 | U$3.201 U$3.196 U$3.191 U$3.186 | U$3.175 U$3.170 | U$3.170 U$3.165 U$3.160 | U$3.134 U$3.139 67.41,44.48 67.18,44.7 65.28,44.7 65.02,44.45 65.02,43.81 66.67,42.16 67.33,42.16 U$3.121 | U$3.134 U$3.129 U$3.124 | U$3.116 U$3.111 U$3.106 | U$3.103 U$3.98 U$3.93 | U$3.93 U$3.88 | U$3.214 73.25,60.33 74.3,60.33 74.95,60.98 U$3.222 U$3.227 73.91,62.36 74.55,62.99 74.55,65.53 | U$3.17 U$3.23 U$3.30 U$3.36 U$3.41 U$3.47 73.95,24.16 | 73.95,24.16 73.98,24.13 | 73.95,24.16 73.95,24.26 74.61,24.92 74.61,29.93 U$3.78 | U$3.78 75.27,30.5 76.04,31.27 76.04,33.46 U$3.96 76.04,35.17 76.04,37.27 U$3.114 | U$3.211 68.99,59.72 69.6,60.33 70.71,60.33 U$3.219 | 70.1,58.42 U$3.206 70.64,58.45 71.25,59.05 71.98,59.05 72.01,59.08 | U$3.157 68.83,48.39 69.47,49.02 69.47,50.19 U$3.170 | U$3.201 72.01,57.81 72.01,59.08 | 72.01,59.08 U$3.214 | U$3.201 71.27,57.17 70.74,56.64 69.57,56.64 U$3.193 U$3.188 U$3.183 U$3.178 U$3.173 U$3.168 74.55,48.92 74.55,47.65 U$3.155 74.57,46.35 | 72.26,62.87 72.14,62.74 72.14,61.75 U$3.219 | U$3.134 70.71,43.81 71.98,43.81 U$3.142 U$3.137 U$3.132 75.18,41.91 76.07,41.27 76.07,38.76 U$3.114 | U$3.119 U$3.114 | U$3.106 73.25,37.47 74.55,37.47 74.55,37.49 U$3.114 | U$3.106 72.01,36.22 72.01,34.95 U$3.93 | U$3.106 U$3.101 | U$3.83 U$3.78 | 72.26,62.87 70.71,62.87 U$3.224 U$3.229 | 74.57,46.35 71.98,46.35 U$3.147 U$3.152 | 74.57,46.35 U$3.150
  Bottom 0.305: SBRIO_AUX.P$4 47.37,16.26 51.18,16.26 52.07,17.14 73.25,17.14 U$3.17
  Bottom 0.406: SBRIO_ANALOG.P$25 SBRIO_ANALOG.P$27 SBRIO_ANALOG.P$29 SBRIO_ANALOG.P$31 SBRIO_ANALOG.P$33 SBRIO_ANALOG.P$35 SBRIO_ANALOG.P$37 SBRIO_ANALOG.P$39 SBRIO_ANALOG.P$41 SBRIO_ANALOG.P$43 SBRIO_ANALOG.P$45 SBRIO_ANALOG.P$47 SBRIO_ANALOG.P$49 62.51,73.66 65.72,73.66 v67.28,75.09 | 5_REG_C1.2 85.09,43.43 | 85.09,43.43 5V_REG_C2.1 | 5V_REG.P$2 85.09,43.43 | SBRIO_AUX.P$20 SBRIO_AUX.P$22 SBRIO_AUX.P$24 SBRIO_AUX.P$26 SBRIO_AUX.P$28 SBRIO_AUX.P$30 SBRIO_AUX.P$32 | 5V_REG.P$2 85.09,54.07 SHOCK_POT_CONN.P$2 96.61,70.48 73.79,70.48 | 101.09,35.53 101.09,45.34 98.93,47.5 86.87,47.5 5V_REG.P$2 | 74.55,65.53 74.55,69.72 73.79,70.48 | 73.79,70.48 71.75,70.48 71.75,70.61 67.31,75.06 | SBRIO_AUX.P$50 SBRIO_AUX.P$49 | SBRIO_AUX.P$48 SBRIO_AUX.P$47 | SBRIO_AUX.P$46 SBRIO_AUX.P$45 | SBRIO_AUX.P$44 SBRIO_AUX.P$43 | SBRIO_AUX.P$42 SBRIO_AUX.P$41 | SBRIO_ANALOG.P$1 SBRIO_ANALOG.P$4 | v57.78,49.78 59.28,48.28 U$3.157
N$
  Bottom 0.406: 91.14,42.42 Q4.P$2 90.12,41.53 R7.1
N$2
  Bottom 0.406: CMOS_BATT.2 67.19,67.71 U$3.236
N$3  (1 unrouted)
N$4
  Bottom 0.406: U$5.P$2 3.97,50.71 9.02,55.75 9.02,74.17 10.51,75.66 SBRIO_ANALOG.P$2
N$5  (1 unrouted)
N$7
  Bottom 0.406: Q1.P$1 12.74,21.59 SHTDWN_CONN.4 10.12,21.71 SHTDWN_CONN.3
N$8
  Bottom 0.406: Q2.P$1 12.66,26.67 SHTDWN_CONN.2 10.12,26.71 SHTDWN_CONN.1
N$9
  Bottom 0.406: U$6.P$1 12.82,16.51 SHTDWN_CONN.6 10.12,16.71 SHTDWN_CONN.5
N$10  (via drill 0.38)
  Top 0.127: v71.37,55.88 72.64,54.36 70.36,52.07 v66.93,50.93
  Bottom 0.127: U$3.195 v71.37,55.88 | v66.93,50.93 57.78,51.05 51.05,44.32 51.05,31.24 50.16,30.35 31.67,30.35 U$6.P$2
N$11  (via drill 0.38)
  Top 0.127: v71.37,54.61 67.69,53.21 66.93,52.58 v66.93,51.82
  Bottom 0.127: U$3.189 v71.37,54.61 | v66.93,51.82 57.4,51.94 50.42,44.96 50.42,33.15 49.4,32.13 45.72,32.13 45.47,31.88 24.77,31.88
  Bottom 0.406: R2.1 16.65,24.91 18.41,26.67 19.43,26.67 24.64,31.88 24.77,31.88
N$12
  Bottom 0.127: U$3.177 71.35,52.09 70.74,52.7 70.74,53.59 70.36,53.98 64.26,53.98 63.88,53.59 57.91,53.59 49.66,45.34 49.66,33.15 48.9,32.38 23.55,32.38
  Bottom 0.406: R3.1 23.55,32.38
N$13
  Bottom 0.406: U$7.P$1 20.32,3.81 HV_BOX_CONN.P$1
N$14
  Bottom 0.406: U$8.P$1 24.13,3.08 HV_BOX_CONN.P$2
N$15  (via drill 0.38)
  Top 0.406: R8.2 52.56,9.4 51.94,9.4 v51.18,10.16
  Bottom 0.406: U$3.192 77.72,52.09 77.72,14.61 73.28,10.16 v51.18,10.16 50.67,10.16 25.99,10.16 U$8.P$2
N$16  (via drill 0.38)
  Top 0.406: R9.1 48.63,9.38 v50.29,11.05
  Bottom 0.406: U$3.180 76.83,50.44 76.83,14.99 72.9,11.05 50.67,11.05 v50.29,11.05 23.07,11.05 U$7.P$2
N$17  (via drill 0.38)
  Top 0.127: v71.37,50.8 79.38,48.9 79.5,48.9
  Top 0.305: THERMO_3.7 83.95,35.81 83.57,36.2 82.8,36.2 v80.64,38.35 | v80.64,48.77 79.5,48.77 79.38,48.9
  Top 0.406: THERMO_2.7 84.07,23.88 | 84.07,23.88 84.07,24 83.69,26.54 83.69,30.73 83.95,33.4 THERMO_3.7 | THERMO_1.7 57.72,22.54 59.05,23.88 84.07,23.88
  Bottom 0.127: U$3.171 v71.37,50.8 | v71.37,50.8 72.01,50.16 72.9,50.16 73.28,49.78 72.14,50.42 72.64,49.91 v71.37,50.8
  Bottom 0.305: v80.64,38.35 80.64,42.04 80.39,42.42 80.39,48.39 v80.64,48.77
N$18  (via drill 0.38)
  Top 0.127: THERMO_2.5 88.27,23.43 88.27,30.73 86.49,32.51 THERMO_3.5 86.49,36.32 85.85,36.96 85.09,36.96 76.33,45.72 75.31,45.72 74.55,46.48 v71.37,48.26
  Top 0.406: THERMO_2.5 88.27,20.13 v88.27,19.05 | v83.69,18.92 78.46,20.98 THERMO_1.5
  Bottom 0.127: U$3.159 v71.37,48.26 71.5,48.01
  Bottom 0.406: v88.27,19.05 v83.69,18.92
N$19
  Top 0.406: U$2.P$6 U$2.P$3
  Bottom 0.406: U$2.P$6 28.32,17.78 24.51,17.78 13.59,6.86 HV_BOX_CONN.P$5
N$20
  Top 0.305: SBRIO_ANALOG.P$6 14.45,74.68 10.29,74.68
  Top 0.406: HV_BOX_CONN.P$8 18.45,1.4 13.08,1.4 5.21,9.27 5.21,31.62 10.29,36.7 10.29,52.32 6.1,56.52 6.1,70.99 9.78,74.68 10.29,74.68
N$21
  Top 0.406: HV_BOX_CONN.P$7 17.59,49.76 BSPD_CONN.4 10.12,54.73 BSPD_CONN.3
  Bottom 0.406: BSPD_CONN.4 11.18,56.17 11.18,63.25 18.41,70.48 18.41,74.67 SBRIO_ANALOG.P$8
N$22
  Top 0.406: Q5.P$1 85.71,47.01 86.49,46.23 86.49,45.09 87.12,44.45 96.11,44.45 DASHBOARD_CONN.P$2
N$23
  Bottom 0.406: Q3.P$1 94.93,39.37 DASHBOARD_CONN.P$3
N$24
  Bottom 0.406: Q4.P$1 97,43.43 DASHBOARD_CONN.P$4
N$25  (via drill 0.38)
  Top 0.305: THERMO_1.6 58.99,19.49 58.29,18.8 57.28,18.8 52.7,14.22 50.67,14.22 49.91,13.46 48.39,13.46 47.5,14.35 47.5,23.88 47.88,24.26 49.15,24.26 63.25,38.35 75.56,38.35 76.45,39.24 76.45,40.51 75.82,41.15 71.5,41.15 69.47,43.18 69.47,46.48 v71.37,46.99
  Bottom 0.305: v71.37,46.99 70.74,47.65 U$3.153
N$27  (via drill 0.38)
  Top 0.127: v71.37,43.18 77.09,42.55 82.93,36.7 84.2,36.7 85.22,35.69 THERMO_3.6
  Bottom 0.127: U$3.135 v71.37,43.18
N$28  (via drill 0.38)
  Top 0.406: THERMO_4.6 58.67,59.31 v59.31,58.67 | v66.29,54.86 65.91,53.59 65.91,45.09 v66.93,43.05
  Bottom 0.127: U$3.123 70.74,41.3 70.74,42.04 70.23,42.55 69.98,42.55 69.85,42.67 68.2,42.67
  Bottom 0.406: v59.31,58.67 59.31,56.01 60.33,54.99 64.14,54.99 v66.29,54.86 | v66.93,43.05 67.18,42.67 68.2,42.67
N$29  (via drill 0.38)
  Top 0.406: THERMO_1.3 58.99,17.08 59.69,17.78 77.34,17.78 v84.84,14.86
  Bottom 0.406: v84.84,14.86 96.77,14.99 THERM_CONN.P$1
N$30  (via drill 0.38)
  Top 0.406: v88.01,17.78 THERMO_2.3
  Bottom 0.406: THERM_CONN.P$3 87.06,16.7 v88.01,17.78
N$31  (via drill 0.38)
  Top 0.406: v85.6,32.13 85.22,31.75 THERMO_3.3
  Bottom 0.406: THERM_CONN.P$5 100.58,6.22 100.58,20.83 95.5,25.91 93.34,25.91 87.12,32.13 v85.6,32.13
N$32  (via drill 0.38)
  Top 0.406: v82.8,28.7 74.42,33.02 v61.21,33.02 | v54.36,43.94 58.67,48.26 THERMO_4.3
  Bottom 0.406: THERM_CONN.P$7 84.64,8.7 83.19,14.1 v82.8,28.7 | v61.21,33.02 54.36,39.88 v54.36,43.94
N$33
  Bottom 0.406: U$9.P$1 4.9,6.49 SHTDWN_CONN.9 10.12,6.71 SHTDWN_CONN.10
N$34
  Bottom 0.305: SBRIO_ANALOG.P$9 19.43,74.04 20.45,75.06 20.45,76.2 21.08,76.83 67.44,76.83 72.23,72.04 SHOCK_POT_CONN.P$4
N$35
  Bottom 0.406: SHOCK_POT_CONN.P$5 100.84,59.82 100.84,72.77 99.82,73.79 73.66,73.79 68.71,78.74 16.51,78.74 14.48,76.71 14.48,74.61 SBRIO_ANALOG.P$5
N$36
  Bottom 0.406: SHOCK_POT_CONN.P$6 100.08,61.06 100.08,72.52 99.57,73.03 73.28,73.03 68.33,77.98 17.78,77.98 16.38,76.58 16.38,73.03 15.88,72.52 14.57,72.52 SBRIO_ANALOG.P$3
N$37
  Top 0.406: U3.14 86.69,72.23 GYRO_C3.2 GYRO_C4.2
N$38
  Top 0.406: GYRO_R.2 GYRO_C3.1
N$39  (via drill 3.17 pad 3.81)
  other vias: 74.93,76.83
N$40  (via drill 3.17 pad 3.81)
  other vias: 3.2,76.83
N$41  (via drill 3.17 pad 3.81)
  other vias: 3.2,3.2
N$42
  Top 0.406: BSPD_CONN.2 10.12,59.73 BSPD_CONN.1
  Bottom 0.406: U$4.P$1 12.62,59.69 BSPD_CONN.2
N$43  (via drill 0.38)
  Top 0.406: v45.21,44.2 v52.07,44.2
  Bottom 0.127: 70.74,45.09 68.07,45.09
  Bottom 0.305: U$3.138 74.55,43.84 74.55,44.7 74.17,45.09 70.74,45.09
  Bottom 0.406: U$4.P$2 29.4,60.64 v45.21,44.2 | v52.07,44.2 52.96,45.09 68.07,45.09
N$44
  Top 0.406: SHTDWN_CONN.7 10.12,11.71 SHTDWN_CONN.8
  Bottom 0.406: U$1.P$1 12.59,11.68 SHTDWN_CONN.8
N$45  (via drill 0.38)
  Top 0.406: v25.78,30.99 v25.78,33.27
  Bottom 0.406: U$10.P$1 27.42,30.99 v25.78,30.99 | v25.78,33.27 19.08,33.27 BSPD_CONN.10 10.12,39.73 BSPD_CONN.9
N$46
  Bottom 0.406: R1.2 9.99,9.4 U$1.P$2
N$47
  Bottom 0.406: R2.2 17.71,23.61 Q1.P$2
N$48
  Bottom 0.406: R3.2 Q2.P$2
N$49
  Bottom 0.406: U$10.P$2 32.72,24.64 R4.2
N$50
  Top 0.406: R5.1 82.63,50.8 Q5.P$2
N$51
  Bottom 0.406: R6.1 88.34,38.35 Q3.P$2
SHIELD
  Bottom 0.406: HV_BOX_CONN.P$6 15.59,7.59 U$2.P$10 25.65,15.37 30.48,15.37 30.86,15.75 30.86,17.78 U$2.P$5

## Text on the board
tNames: Formula Electric 2014: sbRIO Daughter Card